# Altium PCB IS903.PcbDoc
Units mm, origin at the board's own origin, x right, y up, seen from the top; angles counter-clockwise.
Board outline 33 x 14 mm, 2 copper layers (Top Layer, Bottom Layer), stack 1.569 mm thick; 31 components, 62 nets, 440 pads, 0 vias.
Unrouted connection lines stored in the file: 210.
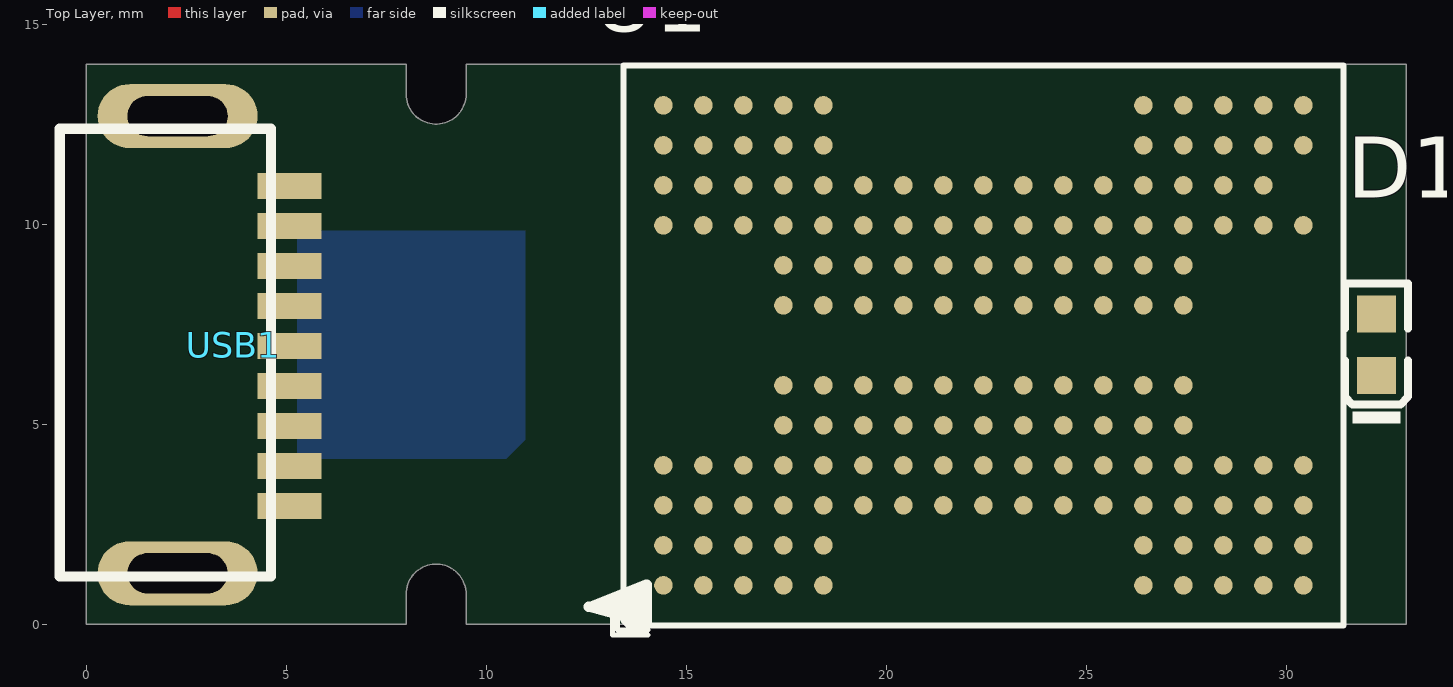
[diagram p0: Top Layer view]
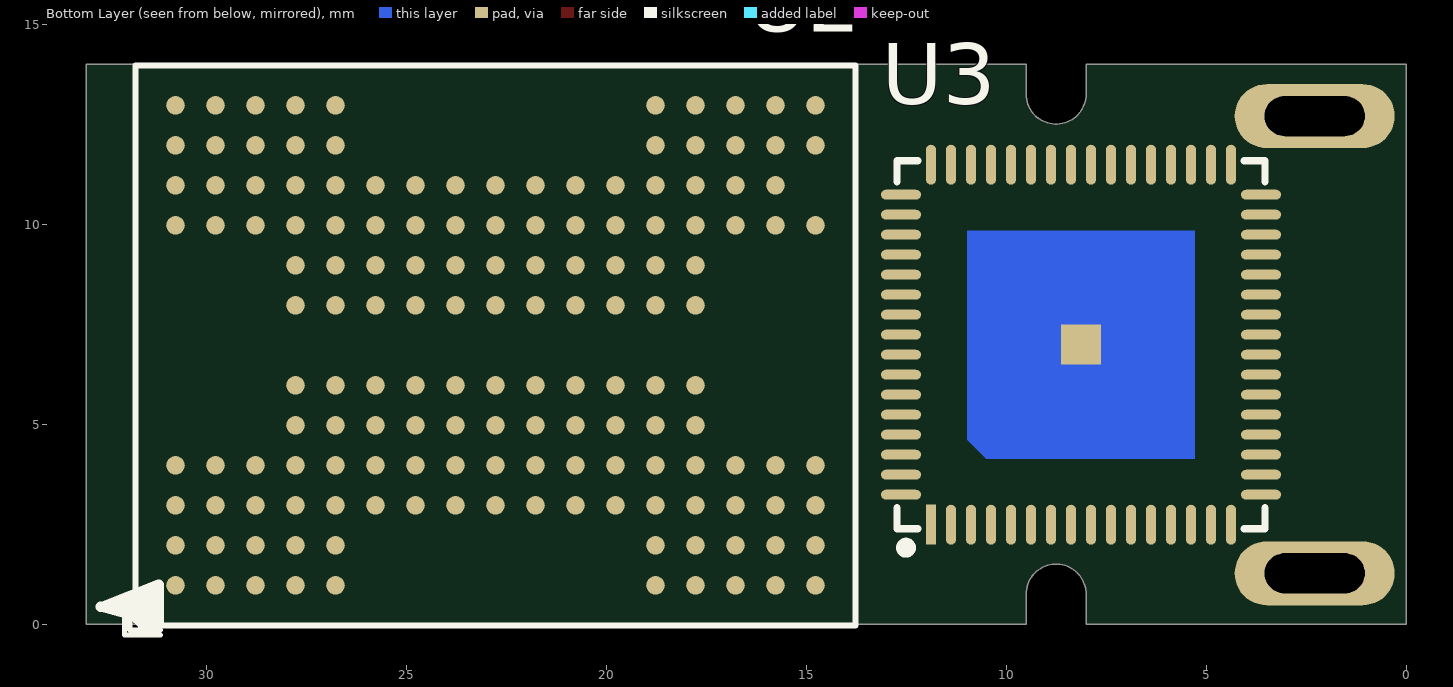
[diagram p1: Bottom Layer view, seen from below]

## Layer stack, top to bottom
Top Solder: solder mask 0.0254, SM-001, Dk 4
Top Layer: signal copper 0.035
Dielectric 1: core 1.4986, Core-043, Dk 4.3
Bottom Layer: signal copper 0.035
Bottom Solder: solder mask 0.0254, SM-001, Dk 4

## Board outline
0,0 0,14 8,14 8,13.25 ccw(c8.75,13.25) 9.5,13.25 9.5,14 33,14 33,0 9.5,0 9.5,0.75 ccw(c8.75,0.75) 8,0.75 8,0

## Design rules (kind name [scope] priority, off if disabled: settings)
Clearance [All] p1: gap=0.254 ignorepadtopadclearanceinfootprint=TRUE except(0: Arc-Hole Track-Hole SMDPad-Hole THPad-Hole Via-Hole Fill-Hole Poly-Hole Region-Hole Text-Hole)
PolygonConnect [All] p1: connectstyle=Relief reliefconductorwidth=0.254 reliefentries=4 polygonreliefangle="90 Angle" airgapwidth=0.254
RoutingVias [All] p1: holewidth=0.711 width=1.27 viastyle="Through Hole" minholewidth=0.711 minwidth=1.27 maxholewidth=0.711 maxwidth=1.27
SolderMaskExpansion [All] p1: expansion=0.102 istentingtop=FALSE
Width [All] p1: maxlimit=0.254 minlimit=0.254 preferedwidth=0.254
30 further rules are at their usual default settings.

## Components (designator, comment, footprint, x,y, rotation, side; value= is the part's Value field where it differs from the comment)
C1 "20pF/6pF" "C 0402_L" 44.45,23.779 r0 top
C2 "20pF/6pF" "C 0402_L" 40.132,23.779 r0 top
C3 "0.01uF" "C 0402_L" 21.209,23.779 r0 top
C4 "0.1uF" "C 0402_L" 37.465,23.525 r0 top
C5 "0.1uF" "C 0402_L" 33.147,23.525 r0 top
C6 "10uF" "C 0603_L" 25.019,23.398 r0 top
C7 "1uF" "C 0603_L" 29.337,23.398 r0 top
C8 "20pF" "C 0402_L" 15.621,23.779 r0 top
C9 "4.7uF" "C 0603_L" -7.874,23.652 r0 top
C10 "10uF" "C 0603_L" 49.911,-9.114 r90 top
C11 "4.7uF" "C 0603_L" 23.495,-8.352 r0 top
C12 "0.1uF" "C 0402_L" 13.208,-8.606 r90 top
D1 "R/W LED" 0603_LED_S1 32.258,6.985 r90 top
L1 "4.7uH  ±10%" LQM2HPN1R0MG0L -2.413,22.255 r0 top
R1 "330R" "R 0402_L" 48.26,23.779 r0 top
R2 "453K" "R 0402_L" 11.176,23.779 r0 top
R3 "100K" "R 0402_L" 2.286,23.779 r0 top
R4 "0R" "R 0402_L" 40.894,-8.225 r0 top
R5 "0R" "R 0402_L" 36.576,-8.225 r0 top
R6 "0R" "R 0402_L" 32.258,-8.225 r0 top
R7 "0R" "R 0402_L" 27.94,-8.225 r0 top
R8 "330R" "R 0402_L" -0.762,-8.225 r0 top
R9 "0R" "R 0402_L" 3.556,-8.225 r0 top
R10 "100K" "R 0402_L" 7.62,-8.606 r90 top
U1 "NAND FLASH BGA152" BGA152 31.893,14.896 r180 top
U2 "NAND FLASH BGA152" BGA152 13.304,14.896 r0 bottom
U3 "IS903_QFN64_8*8" "QFN64 9x9_L" 8.128,6.985 r180 bottom
U4 "EML3020-DFN6" SON50P200X200X80-7N-D 7.366,22.89 r0 top
U5 "EMP8733" SOT23-3L 46.228,-9.495 r0 top
USB1 "USB 3.0 TYPE A" USB3.0-G 3.683,6.985 r0 top
Y1 "30MHZ" "OSC 2025-4P" 53.086,23.017 r0 top

## Footprints (in the part's own frame and the unit in brackets; to place one, negate y for a bottom-side part, rotate by r counter-clockwise, add the part's x,y. Pads: shape width x height; smd on the part's side, far side on the other; paste and mask are expansions set on the pad)
0603_LED_S1 [mm]
  rect 0.93x0.98 smd: A(0.77,0) K(-0.77,0)
  silkscreen extent -1.98,-0.79 1.54,0.79, body extent -0.8,-0.4 0.8,0.4, height 0.6
BGA152 [mm] "NAND FLASH"
  round 0.465 smd: A1(17.461,13.927) A2(17.461,12.927) A3(17.461,11.927) A4(17.461,10.927) A10(17.461,4.927) A11(17.461,3.927) A12(17.461,2.927) A13(17.461,1.927) B1(16.461,13.927) B2(16.461,12.927) B3(16.461,11.927) B4(16.461,10.927) B10(16.461,4.927) B11(16.461,3.927) B12(16.461,2.927) B13(16.461,1.927) C1(15.461,13.927) C2(15.461,12.927) C3(15.461,11.927) C4(15.461,10.927) C10(15.461,4.927) C11(15.461,3.927) C12(15.461,2.927) C13(15.461,1.927) D1(14.461,13.927) D2(14.461,12.927) D3(14.461,11.927) D4(14.461,10.927) D5(14.461,9.927) D6(14.461,8.927) D8(14.461,6.927) D9(14.461,5.927) D10(14.461,4.927) D11(14.461,3.927) D12(14.461,2.927) D13(14.461,1.927) E1(13.461,13.927) E2(13.461,12.927) E3(13.461,11.927) E4(13.461,10.927) E5(13.461,9.927) E6(13.461,8.927) E8(13.461,6.927) E9(13.461,5.927) E10(13.461,4.927) E11(13.461,3.927) E12(13.461,2.927) E13(13.461,1.927) F3(12.461,11.927) F4(12.461,10.927) F5(12.461,9.927) F6(12.461,8.927) F8(12.461,6.927) F9(12.461,5.927) F10(12.461,4.927) F11(12.461,3.927) G3(11.461,11.927) G4(11.461,10.927) G5(11.461,9.927) G6(11.461,8.927) G8(11.461,6.927) G9(11.461,5.927) G10(11.461,4.927) G11(11.461,3.927) H3(10.461,11.927) H4(10.461,10.927) H5(10.461,9.927) H6(10.461,8.927) H8(10.461,6.927) H9(10.461,5.927) H10(10.461,4.927) H11(10.461,3.927) J3(9.461,11.927) J4(9.461,10.927) J5(9.461,9.927) J6(9.461,8.927) J8(9.461,6.927) J9(9.461,5.927) J10(9.461,4.927) J11(9.461,3.927) K3(8.461,11.927) K4(8.461,10.927) K5(8.461,9.927) K6(8.461,8.927) K8(8.461,6.927) K9(8.461,5.927) K10(8.461,4.927) K11(8.461,3.927) L3(7.461,11.927) L4(7.461,10.927) L5(7.461,9.927) L6(7.461,8.927) L8(7.461,6.927) L9(7.461,5.927) L10(7.461,4.927) L11(7.461,3.927) M3(6.461,11.927) M4(6.461,10.927) M5(6.461,9.927) M6(6.461,8.927) M8(6.461,6.927) M9(6.461,5.927) M10(6.461,4.927) M11(6.461,3.927) N1(5.461,13.927) N2(5.461,12.927) N3(5.461,11.927) N4(5.461,10.927) N5(5.461,9.927) N6(5.461,8.927) N8(5.461,6.927) N9(5.461,5.927) N10(5.461,4.927) N11(5.461,3.927) N12(5.461,2.927) N13(5.461,1.927) P1(4.461,13.927) P2(4.461,12.927) P3(4.461,11.927) P4(4.461,10.927) P5(4.461,9.927) P6(4.461,8.927) P8(4.461,6.927) P9(4.461,5.927) P10(4.461,4.927) P11(4.461,3.927) P12(4.461,2.927) P13(4.461,1.927) R1(3.461,13.927) R2(3.461,12.927) R3(3.461,11.927) R4(3.461,10.927) R10(3.461,4.927) R11(3.461,3.927) R12(3.461,2.927) R13(3.461,1.927) T1(2.461,13.927) T2(2.461,12.927) T3(2.461,11.927) T4(2.461,10.927) T10(2.461,4.927) T11(2.461,3.927) T12(2.461,2.927) T13(2.461,1.927) U1(1.461,13.927) U2(1.461,12.927) U3(1.461,11.927) U4(1.461,10.927) U10(1.461,4.927) U12(1.461,2.927) U13(1.461,1.927)
  silkscreen extent 0.46,0.93 19.33,15.17
"C 0402_L" [mm] "无极性贴片电容"
  rect 0.4x0.5 smd: 1(-0.45,0) 2(0.45,0)
  silkscreen extent -0.85,-0.45 0.85,0.45, body extent -0.5,-0.26 0.5,0.26, height 0.53
"C 0603_L" [mil] "无极性贴片电容"
  rect 30x30 smd: 1(-25.59,0) 2(25.59,0)
  silkscreen extent -51,-26 51,26, body extent -31,-16 31,16, height 32
LQM2HPN1R0MG0L [mm]
  rect 0.7x1.5 smd: 1(-1.15,0) 2(1.15,0)
  silkscreen extent 0,-1 0,1, body extent -1.43,-1 1.43,1, height 1.1
"OSC 2025-4P" [mm] "2*2.5*0.55mm(长宽高)"
  rect 1.2x1 smd: 1(-0.85,-0.65) 2(0.85,-0.65) 3(0.85,0.65) 4(-0.85,0.65)
  silkscreen extent -1.75,-1.4 1.63,1.32, body extent -1.25,-1 1.25,1, height 0.55
"QFN64 9x9_L" [mm] "64脚，长x宽x高：9x9x1mm，脚距：0.5mm"
  rect 0.25x1 smd: 1(-3.75,-4.5)
  oval 0.25x1 smd: 2(-3.25,-4.5) 3(-2.75,-4.5) 4(-2.25,-4.5) 5(-1.75,-4.5) 6(-1.25,-4.5) 7(-0.75,-4.5) 8(-0.25,-4.5) 9(0.25,-4.5) 10(0.75,-4.5) 11(1.25,-4.5) 12(1.75,-4.5) 13(2.25,-4.5) 14(2.75,-4.5) 15(3.25,-4.5) 16(3.75,-4.5) 33(3.75,4.5) 34(3.25,4.5) 35(2.75,4.5) 36(2.25,4.5) 37(1.75,4.5) 38(1.25,4.5) 39(0.75,4.5) 40(0.25,4.5) 41(-0.25,4.5) 42(-0.75,4.5) 43(-1.25,4.5) 44(-1.75,4.5) 45(-2.25,4.5) 46(-2.75,4.5) 47(-3.25,4.5) 48(-3.75,4.5)
  oval 1x0.25 smd: 17(4.5,-3.75) 18(4.5,-3.25) 19(4.5,-2.75) 20(4.5,-2.25) 21(4.5,-1.75) 22(4.5,-1.25) 23(4.5,-0.75) 24(4.5,-0.25) 25(4.5,0.25) 26(4.5,0.75) 27(4.5,1.25) 28(4.5,1.75) 29(4.5,2.25) 30(4.5,2.75) 31(4.5,3.25) 32(4.5,3.75) 49(-4.5,3.75) 50(-4.5,3.25) 51(-4.5,2.75) 52(-4.5,2.25) 53(-4.5,1.75) 54(-4.5,1.25) 55(-4.5,0.75) 56(-4.5,0.25) 57(-4.5,-0.25) 58(-4.5,-0.75) 59(-4.5,-1.25) 60(-4.5,-1.75) 61(-4.5,-2.25) 62(-4.5,-2.75) 63(-4.5,-3.25) 64(-4.5,-3.75)
  rect 1x1 smd: 69(0,0)
  Top Layer region: -2.85,2.85 2.85,2.85 2.85,-2.85 -2.375,-2.85 -2.85,-2.375
  silkscreen extent -4.6,-5.2 4.6,4.6, body extent -4.51,-4.51 4.51,4.51, height 0.95
"R 0402_L" [mm] "1/16W贴片电阻"
  rect 0.4x0.5 smd: 1(-0.4,0) 2(0.45,0)
  silkscreen extent -0.8,-0.45 0.85,0.45, body extent -0.5,-0.25 0.5,0.25, height 0.3
SON50P200X200X80-7N-D [mm]
  rect 0.85x0.3 smd: 1(-0.95,0.5) 2(-0.95,0) 3(-0.95,-0.5) 4(0.95,-0.5) 5(0.95,0) 6(0.95,0.5)
  rect 0.61x1.42 smd: 7(0,0)
  silkscreen extent -1.5,1.03 -1.25,1.27, body extent -1.05,-1 1.05,1, height 0.8
SOT23-3L [mm] "3x1.3x1mm(长宽高)"
  rect 0.45x1 smd: 1(-0.95,-1.143) 2(0.95,-1.143) 3(0,1.125)
  silkscreen extent -1.72,-1.65 1.5,0.7, body extent -1.5,-1.2 1.5,1.2, height 1.05
USB3.0-G [mm]
  oval 4x1.6 hole 1 slot 2.5 at 0 deg: 0(-1.397,-5.715) 0(-1.397,5.715)
  rect 1.6x0.65 smd: 1(1.397,3.974) 2(1.397,2.973) 3(1.397,1.974) 4(1.397,0.974) 5(1.397,-0.026) 6(1.397,-1.026) 7(1.397,-2.026) 8(1.397,-3.026) 9(1.397,-4.026)
  silkscreen extent -4.34,-5.79 0.94,5.4, body extent -18.89,-6.03 1.87,5.97, height 3.3

## Part data
C1 C2 C3 C4 C5 C8 C12: library part "0402 2.2nF (222) 10% 50V", "贴片电容", Package=0402, SuppliersPartNumber=C1531, ComponentLink1Description=供应商链接, ComponentLink1URL=http://www.szlcsc.com/product/details_1883.html, Supplier=LC
C6 C7 C9 C10 C11: library part "0603 100nF (104) 10% 50V", "贴片电容", Package=0603, SuppliersPartNumber=C14663, ComponentLink1Description=供应商链接, ComponentLink1URL=http://www.szlcsc.com/product/details_15331.html, Supplier=LC
D1: library part "0603 蓝灯", "发光二极管", Package=0603, SuppliersPartNumber=C72041, ComponentLink1Description=供应商链接, ComponentLink1URL=http://www.szlcsc.com/product/details_73150.html, Supplier=LC
L1: library part "1206 4.7uH  10%", "贴片电感", Package=1206, SuppliersPartNumber=C1049, ComponentLink1Description=供应商链接, ComponentLink1URL=http://www.szlcsc.com/product/details_1401.html, Supplier=LC
R1 R2 R3 R4 R5 R6 R7 R8 R9 R10: library part "0402 22Ω (22R0) 1%", "贴片电阻", Package=0402, SuppliersPartNumber=C25092, ComponentLink1Description=供应商链接, ComponentLink1URL=http://www.szlcsc.com/product/details_25835.html, Supplier=LC
Y1: library part 晶振

## Nets (pads, with @x,y where several pads share a name; then routed paths per layer and width w, separated by ;. In a path a pad name is that pad's centre, name@x,y a point inside that pad or via, vN(x,y) a via of type N, cw(c..) or ccw(c..) an arc to the next point about the centre after c; other vN are vias at no path point)
1.2V: C6.2 U3.6 U3.29 U3.41 U3.56 U5.2
3.3V: C7.2 C8.1 C10.2 C11.2 L1.2 R2.2 R8.2 U1.D3 U1.D4 U1.D8 U1.D10 U1.D11 U1.G4 U1.G10 U1.J4 U1.J10 U1.L4 U1.L10 U1.P3 U1.P4 U1.P6 U1.P10 U1.P11 U2.D3 U2.D4 U2.D8 U2.D10 U2.D11 U2.G4 U2.G10 U2.J4 U2.J10 U2.L4 U2.L10 U2.P3 U2.P4 U2.P6 U2.P10 U2.P11 U3.14 U3.24 U3.38 U3.51 U3.62 U5.1
DM: U3.37 USB1.2
DP: U3.36 USB1.3
F0_ALE: U1.L9 U2.G5 U3.13
F0_CE0n: U1.K5 U3.20
F0_CE1n: U1.K6 U3.21
F0_CE2n: R6.1 U2.H9 U3.22
F0_CE3n: R7.1 U2.H8 U3.23
F0_CLE: U1.L8 U2.G6 U3.12
F0_DQS: U1.N8 U2.E6 U3.46
F0_IO0: U1.M11 U2.F3 U3.47
F0_IO1: U1.M10 U2.F4 U3.48
F0_IO2: U1.N10 U2.E4 U3.49
F0_IO3: U1.P9 U2.D5 U3.50
F0_IO4: U1.P5 U2.D9 U3.52
F0_IO5: U1.N4 U2.E10 U3.53
F0_IO6: U1.M4 U2.F10 U3.54
F0_IO7: U1.M3 U2.F11 U3.55
F0_REn: U1.N6 U2.E8 U3.11
F0_WEn: U1.M6 U2.F8 U3.10
F1_ALE: U1.G5 U2.L9 U3.18
F1_CE0n: U1.H9 U3.25
F1_CE1n: U1.H8 U3.26
F1_CE2n: R5.2 U2.K5 U3.27
F1_CE3n: R4.2 U2.K6 U3.28
F1_CLE: U1.G6 U2.L8 U3.17
F1_DQS: U1.E6 U2.N8 U3.57
F1_IO0: U1.F3 U2.M11 U3.58
F1_IO1: U1.F4 U2.M10 U3.59
F1_IO2: U1.E4 U2.N10 U3.60
F1_IO3: U1.D5 U2.P9 U3.61
F1_IO4: U1.D9 U2.P5 U3.63
F1_IO5: U1.E10 U2.N4 U3.64
F1_IO6: U1.F10 U2.M4 U3.1
F1_IO7: U1.F11 U2.M3 U3.2
F1_REn: U1.E8 U2.N6 U3.16
F1_WEn: U1.F8 U2.M6 U3.15
F_R/Bn: U1.J5 U1.J6 U1.J8 U1.J9 U2.J5 U2.J6 U2.J8 U2.J9
F_WPn: U1.H5 U1.K9 U2.H5 U2.K9 U3.19
GND: C1.2 C2.2 C3.2 C6.1 C7.1 C9.1 C10.1 C11.1 C12.2 R3.2 R9.2 R10.2 U1.D6 U1.E3 U1.E5 U1.E9 U1.E11 U1.G3 U1.G11 U1.J3 U1.J11 U1.L3 U1.L11 U1.N3 U1.N5 U1.N9 U1.N11 U1.P8 U2.D6 U2.E3 U2.E5 U2.E9 U2.E11 U2.G3 U2.G11 U2.J3 U2.J11 U2.L3 U2.L11 U2.N3 U2.N5 U2.N9 U2.N11 U2.P8 U3.3 U3.4 U3.7 U3.44 U4.5 U4.7 U5.3 USB1.4 USB1.7 Y1.2 Y1.4
LED_0: D1.K U3.9
MODE_1: R10.1 U3.45
NetC1_1: C1.1 R1.1 Y1.3
NetC4_1: C4.1 USB1.6
NetC5_1: C5.1 USB1.5
NetC8_2: C8.2 R2.1 R3.1 U4.6
NetD1_A: D1.A R8.1
NetL1_1: L1.1 U4.4
NetR4_1: R4.1 U1.G8
NetR5_1: R5.1 U1.G9
NetR6_2: R6.2 U1.L5
NetR7_2: R7.2 U1.L6
OSCIN: C2.1 U3.35 Y1.1
OSCIO: R1.2 U3.34
RST: C12.1 U3.8
SSRXM: U3.42 USB1.8
SSRXP: U3.43 USB1.9
SSTXM: C5.2 U3.39
SSTXP: C4.2 U3.40
USB5V: C3.1 C9.2 U4.2 U4.3 USB1.1
VSS_1: R9.1 U1.H11 U1.K3 U1.K10
pads on no net: U1.A1 U1.A2 U1.A3 U1.A4 U1.A10 U1.A11 U1.A12 U1.A13 U1.B1 U1.B2 U1.B3 U1.B4 U1.B10 U1.B11 U1.B12 U1.B13 U1.C1 U1.C2 U1.C3 U1.C4 U1.C10 U1.C11 U1.C12 U1.C13 U1.D1 U1.D2 U1.D12 U1.D13 U1.E1 U1.E2 U1.E12 U1.E13 U1.F5 U1.F6 U1.F9 U1.H3 U1.H4 U1.H6 U1.H10 U1.K4 U1.K8 U1.K11 U1.M5 U1.M8 U1.M9 U1.N1 U1.N2 U1.N12 U1.N13 U1.P1 U1.P2 U1.P12 U1.P13 U1.R1 U1.R2 U1.R3 U1.R4 U1.R10 U1.R11 U1.R12 U1.R13 U1.T1 U1.T2 U1.T3 U1.T4 U1.T10 U1.T11 U1.T12 U1.T13 U1.U1 U1.U2 U1.U3 U1.U4 U1.U10 U1.U12 U1.U13 U2.A1 U2.A2 U2.A3 U2.A4 U2.A10 U2.A11 U2.A12 U2.A13 U2.B1 U2.B2 U2.B3 U2.B4 U2.B10 U2.B11 U2.B12 U2.B13 U2.C1 U2.C2 U2.C3 U2.C4 U2.C10 U2.C11 U2.C12 U2.C13 U2.D1 U2.D2 U2.D12 U2.D13 U2.E1 U2.E2 U2.E12 U2.E13 U2.F5 U2.F6 U2.F9 U2.G8 U2.G9 U2.H3 U2.H4 U2.H6 U2.H10 U2.H11 U2.K3 U2.K4 U2.K8 U2.K10 U2.K11 U2.L5 U2.L6 U2.M5 U2.M8 U2.M9 U2.N1 U2.N2 U2.N12 U2.N13 U2.P1 U2.P2 U2.P12 U2.P13 U2.R1 U2.R2 U2.R3 U2.R4 U2.R10 U2.R11 U2.R12 U2.R13 U2.T1 U2.T2 U2.T3 U2.T4 U2.T10 U2.T11 U2.T12 U2.T13 U2.U1 U2.U2 U2.U3 U2.U4 U2.U10 U2.U12 U2.U13 U3.5 U3.30 U3.31 U3.32 U3.33 U3.69 U4.1 USB1.0

## Silkscreen, mask and mechanical layers (free items; w line width, h text height)
Mechanical 1:
  the board outline again, w0.254